# EAGLE board LargeSewableLED_ThruHole (EAGLE 9.6.2)
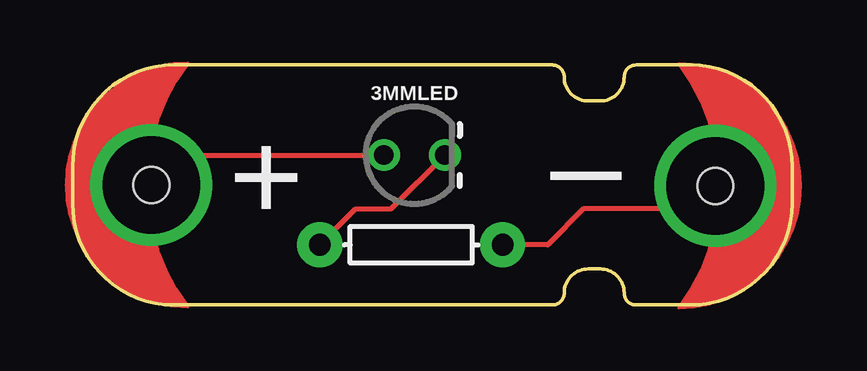
[diagram p0: board, top side]
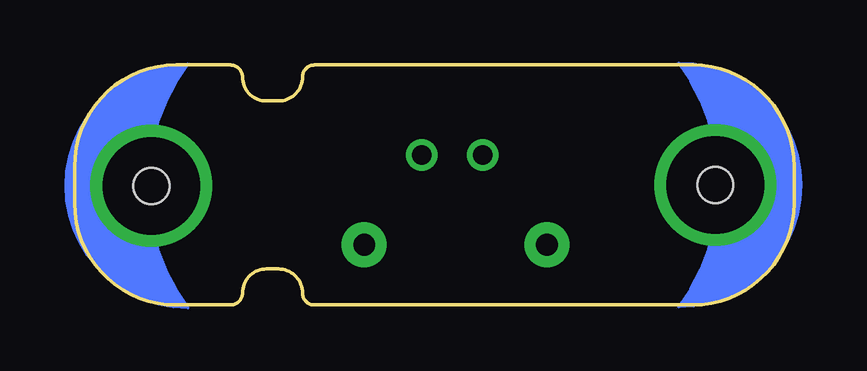
[diagram p1: board, bottom side, seen from below]

Size 30 x 10 mm. Coordinates in mm from the lower left corner, seen from the top.
Outline: 0,4.23 0,5.77 arc-90 4.23,10 20,10 arc-90 20.5,9.5 arc90 21.5,8.5 22,8.5 arc90 23,9.5 arc-90 23.5,10 25.77,10 arc-90 30,5.77 30,4.23 arc-90 25.77,0 23.5,0 arc-90 23,0.5 arc90 22,1.5 21.5,1.5 arc90 20.5,0.5 arc-90 20,0 4.23,0 arc-90 0,4.23
Copper layers (1*16): Top 0.035mm / dielectric 1.5mm / Bottom 0.035mm
Design rules "default": minimum track width 6mil, minimum drill 0.35mm, track to track 6mil, track to pad 6mil, pad to pad 6mil, via to via 6mil, smd to smd 6mil, copper to edge 40mil, drill to drill 6mil, minimum pad ring 10mil, minimum via ring 8mil, stop-mask expansion 4mil, vias tented up to drill 0mil, thermal gap 10mil

## Footprints (pad centres in the part's own frame; a part is rotated, then mirrored left to right if it is on the bottom)
LED_3MM-NS = drill 0.813: A -1.27,0; K 1.27,0
PETAL-LARGE-2SIDE = drill 4.064: 1 0,2.286 | hole 1.5: 0,2.286
AXIAL-0.3 = drill 0.9 pad 1.88: P$1 -3.81,0; P$2 3.81,0

## Placement (x,y rotation side)
3MMLED  [LED_3MM-NS]  14.25,6.25 0 top
LED+  SEWTAP_LARGE-2SIDE  [PETAL-LARGE-2SIDE]  1,5 270 top
LED-  SEWTAP_LARGE-2SIDE  [PETAL-LARGE-2SIDE]  29.09,4.96 90 top
R2  330  [AXIAL-0.3]  14.12,2.51 0 top

## Library data of the parts
3MMLED = SparkFun-LED
LED+ LED- = LilyPad-Large
R2 = SparkFun-Resistors; PROD_ID: RES-8371

## Nets
N$4: 3MMLED.A LED+.1
N$5: 3MMLED.K R2.P$1
N$6: LED-.1 R2.P$2

## Tracks (layer width: path | path; a pad name or v marks a point on that pad's centre or on a via)
N$4
  Top 0.2: LED+.1 4.53,6.25 3MMLED.A
N$5
  Top 0.2: R2.P$1 11.8,4 13.28,4 3MMLED.K
  Bottom 0.152: 15.5,6 3MMLED.K
N$6
  Top 0.2: LED-.1 25.84,4 21.3,4 19.81,2.51 R2.P$2

## Text on the board
_tsilk: – | +